# Altium PCB 1.PcbDoc (part 2 of 2)
Units mm, origin at the board's own origin, x right, y up, seen from the top; angles counter-clockwise.
Board outline 30 x 50 mm, 4 copper layers (Top Layer, Middle1, Middle2, Bottom Layer), stack 0.778 mm thick; 91 components, 108 nets, 401 pads, 138 vias.
Unrouted connection lines stored in the file: 70.
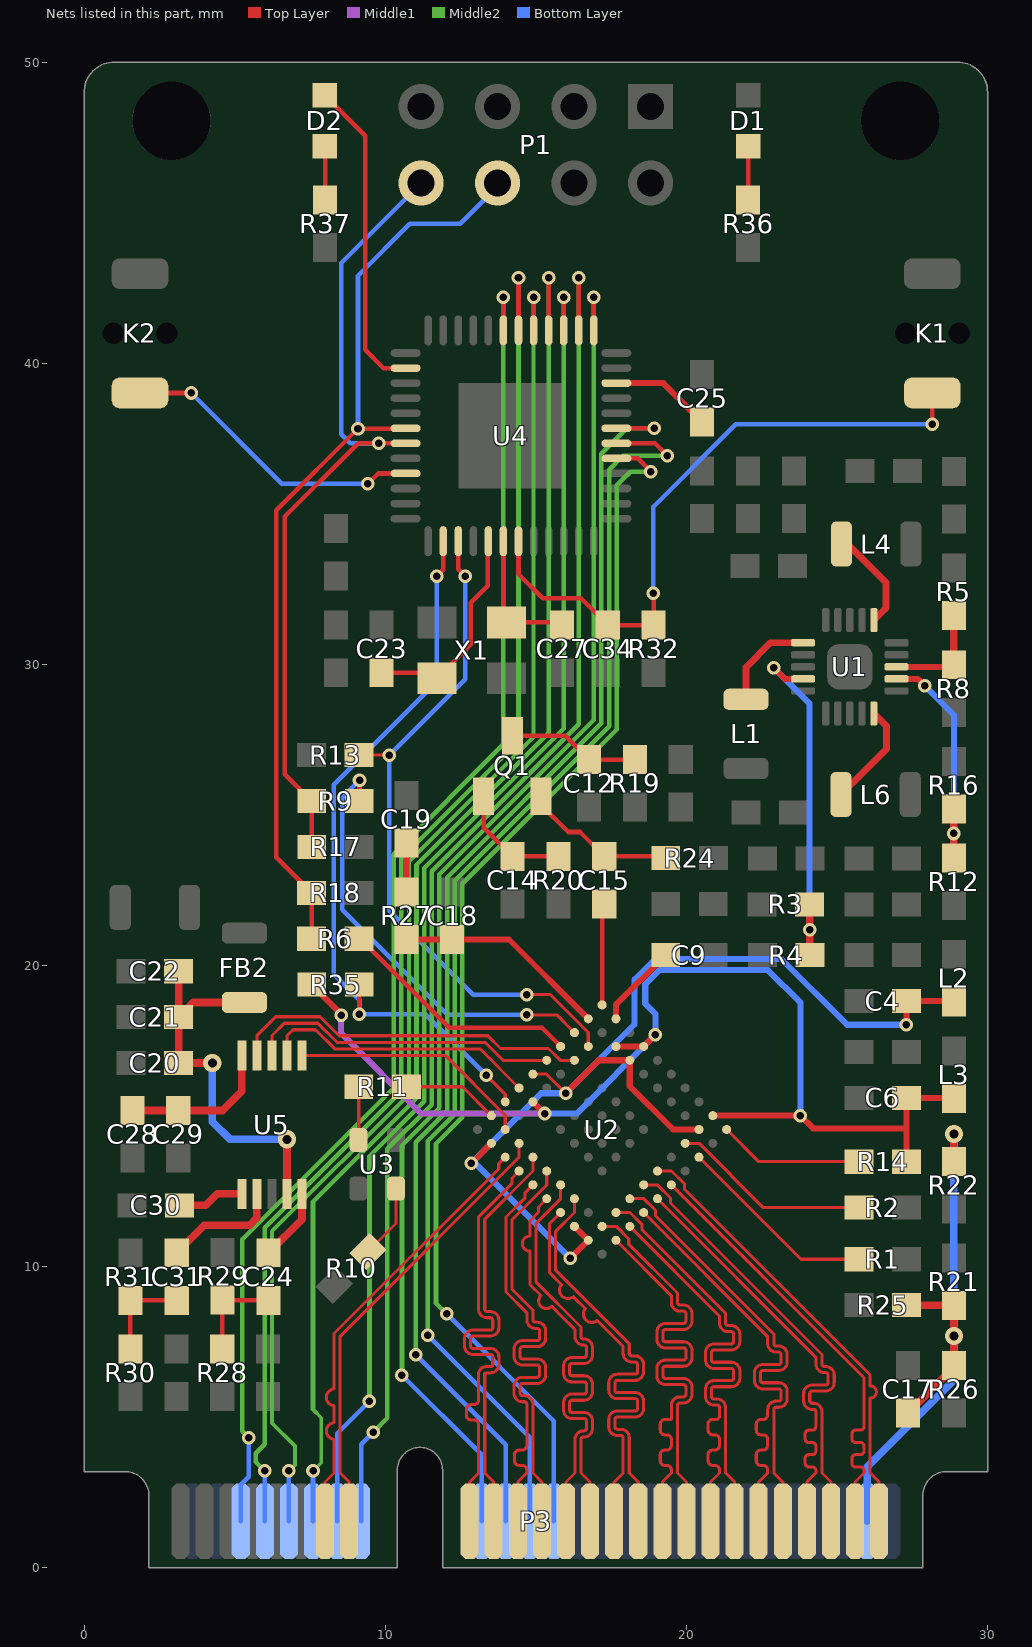
[diagram p4: the nets of this part, all layers, seen from the top]

## Via types
v1: diameter 0.45, hole 0.25, Top Layer to Bottom Layer, tented both sides, 84 vias
v2: diameter 0.6, hole 0.3, Top Layer to Bottom Layer, tented both sides, 54 vias

## Nets (pads, with @x,y where several pads share a name; then routed paths per layer and width w, separated by ;. In a path a pad name is that pad's centre, name@x,y a point inside that pad or via, vN(x,y) a via of type N, cw(c..) or ccw(c..) an arc to the next point about the centre after c; other vN are vias at no path point) (continued)
I2S_OSCK: U2.J4 U5.4 | length 12.1
  Top Layer w0.102: U5.4@5.736,17.019 5.736,17.674 6.363,18.301 7.831,18.301 8.461,17.67 13.404,17.67 13.827,17.247 15.419,17.247 15.811,16.855 U2.J4@16.281,16.855
I2S_SCK: U2.K7 U5.2 | length 9.2
  Top Layer w0.102: U5.2@6.736,17.019 6.736,17.67 6.934,17.869 7.683,17.869 8.319,17.234 13.144,17.234 U2.K7@14.442,15.935
I2S_SD: U2.J9 U5.1 | length 8
  Top Layer w0.102: U5.1@7.236,17.019 11.988,17.019 13.983,15.024 U2.J9@13.983,14.557
I2S_WFS: U2.K5 U5.3 | length 10.5
  Top Layer w0.102: U5.3@6.236,17.019 6.236,17.678 6.642,18.085 7.76,18.085 8.395,17.45 13.311,17.45 13.906,16.855 U2.K5@15.362,16.855
IIC_SCL: P1.6 R6.1 R18.1 U4.42 | length 31.2
  Top Layer w0.152: R6.1@7.551,20.892 R18.1@7.551,22.415 6.375,23.591 6.375,35.115 v1(9.093,37.833) 10.664,37.833 U4.42@10.673,37.842
  Bottom Layer w0.152: v1(9.093,37.833) 9.093,42.913 10.808,44.628 12.484,44.628 13.73,45.874 P1.6@13.73,45.987
IIC_SDA: P1.8 R9.1 R17.1 U4.43 | length 27.2
  Top Layer w0.152: R17.1@7.556,23.939 R9.1@7.557,25.463 6.667,26.353 6.667,34.912 9.097,37.342 v1(9.779,37.342) U4.43@10.673,37.342
  Bottom Layer w0.152: v1(9.779,37.342) 8.835,37.342 8.534,37.643 8.534,43.331 P1.8@11.19,45.987
INT: R13.1 U2.J3 U4.3 | length 23.2
  Top Layer w0.102: R13.1@9.131,26.987 v1(10.135,26.987) ; v1(14.694,19.037) 15.481,19.037 16.74,17.778 U2.J3@16.74,17.314
  Top Layer w0.152: U4.3@12.423,34.092 12.423,33.157 v1(12.649,32.931)
  Bottom Layer w0.152: v1(12.649,32.931) 12.649,29.502 v1(10.135,26.987) 10.135,21.819 12.916,19.037 v1(14.694,19.037)
KEY1: K2.1 U4.45 | length 10.2
  Top Layer w0.152: K2.1@1.854,39.014 v1(3.556,39.014) ; v1(9.423,36.005) 9.761,36.342 U4.45@10.673,36.342
  Bottom Layer w0.152: v1(3.556,39.014) 6.566,36.005 v1(9.423,36.005)
MIPI0_C_N: P3.23 U2.F9 | length 15.1
  Top Layer w0.102: P3.23@15.2,1.55 15.2,2.851 14.902,3.149 14.902,5.435 ccw(c14.617,5.435) 14.617,5.719 14.559,5.719 cw(c14.559,5.801) 14.477,5.801 14.477,6.044 cw(c14.559,6.044) 14.559,6.126 15.041,6.126 ccw(c15.041,6.41) 15.326,6.41 15.326,6.654 ccw(c15.041,6.654) 15.041,6.938 14.559,6.938 cw(c14.559,7.02) 14.477,7.02 14.477,7.264 cw(c14.559,7.264) 14.559,7.345 15.041,7.345 ccw(c15.041,7.629) 15.326,7.629 15.326,7.873 ccw(c15.041,7.873) 15.041,8.158 14.983,8.158 cw(c14.983,8.239) 14.902,8.239 14.902,8.555 14.211,9.246 14.211,11.567 15.362,12.717 U2.F9@15.362,13.178
MIPI0_C_P: P3.21 U2.F10 | length 15.1
  Top Layer w0.102: P3.21@14.4,1.55 14.4,2.851 14.698,3.149 14.698,3.251 ccw(c14.546,3.251) 14.546,3.403 14.444,3.403 cw(c14.444,3.556) 14.292,3.556 14.292,3.759 cw(c14.444,3.759) 14.444,3.911 14.546,3.911 ccw(c14.546,4.064) 14.698,4.064 14.698,4.381 14.698,5.435 ccw(c14.617,5.435) 14.617,5.516 14.559,5.516 cw(c14.559,5.801) 14.274,5.801 14.274,6.044 cw(c14.559,6.044) 14.559,6.329 15.041,6.329 ccw(c15.041,6.41) 15.123,6.41 15.123,6.654 ccw(c15.041,6.654) 15.041,6.735 14.559,6.735 cw(c14.559,7.02) 14.274,7.02 14.274,7.264 cw(c14.559,7.264) 14.559,7.548 15.041,7.548 ccw(c15.041,7.629) 15.123,7.629 15.123,7.873 ccw(c15.041,7.873) 15.041,7.954 14.983,7.954 cw(c14.983,8.239) 14.698,8.239 14.698,8.471 14.008,9.161 14.008,11.651 14.643,12.286 14.643,12.459 U2.F10@14.902,12.718
MIPI0_D0_N: P3.15 U2.H9 | length 15.1
  Top Layer w0.102: P3.15@8.8,1.55 8.8,2.851 8.502,3.149 8.502,7.695 14.442,13.636 U2.H9@14.442,14.097
MIPI0_D0_P: P3.13 U2.H10 | length 15.1
  Top Layer w0.102: P3.13@8,1.55 8,2.851 8.298,3.149 8.298,3.708 8.298,4.267 cw(c8.325,4.546) 8.298,4.826 8.298,5.384 cw(c8.325,5.664) 8.298,5.943 8.298,6.502 8.298,6.858 8.298,7.78 13.767,13.248 13.767,13.422 U2.H10@13.983,13.637
MIPI0_D1_N: P3.19 U2.G9 | length 15.1
  Top Layer w0.102: P3.19@13.6,1.55 13.6,2.851 13.302,3.149 13.302,6.439 cw(c13.34,6.439) 13.34,6.477 13.487,6.477 ccw(c13.487,6.761) 13.771,6.761 13.771,7.005 ccw(c13.487,7.005) 13.487,7.29 12.913,7.29 cw(c12.913,7.371) 12.832,7.371 12.832,7.615 cw(c12.913,7.615) 12.913,7.696 13.487,7.696 ccw(c13.487,7.981) 13.771,7.981 13.771,8.225 ccw(c13.487,8.225) 13.487,8.509 13.383,8.509 cw(c13.383,8.59) 13.302,8.59 13.302,11.576 14.902,13.177 U2.G9@14.902,13.637
MIPI0_D1_P: P3.17 U2.G10 | length 15.1
  Top Layer w0.102: P3.17@12.8,1.55 12.8,2.851 13.098,3.149 13.098,4.559 13.098,4.763 ccw(c12.946,4.763) 12.946,4.915 12.844,4.915 cw(c12.844,5.067) 12.692,5.067 12.692,5.271 cw(c12.844,5.271) 12.844,5.423 12.946,5.423 ccw(c12.946,5.575) 13.098,5.575 13.098,5.931 13.098,6.185 13.098,6.439 cw(c13.34,6.439) 13.34,6.68 13.487,6.68 ccw(c13.487,6.761) 13.568,6.761 13.568,7.005 ccw(c13.487,7.005) 13.487,7.087 12.913,7.087 cw(c12.913,7.371) 12.628,7.371 12.628,7.615 cw(c12.913,7.615) 12.913,7.899 13.487,7.899 ccw(c13.487,7.981) 13.568,7.981 13.568,8.225 ccw(c13.487,8.225) 13.487,8.306 13.383,8.306 cw(c13.383,8.59) 13.098,8.59 13.098,11.66 14.211,12.773 14.211,12.947 U2.G10@14.442,13.178
MIPI0_D2_N: P3.27 U2.E9 | length 15.1
  Top Layer w0.102: U2.E9@15.821,12.718 15.821,12.257 15.011,11.448 15.011,9.487 16.502,7.997 16.502,7.68 ccw(c16.583,7.68) 16.583,7.599 ; 16.583,4.348 ccw(c16.583,4.267) 16.502,4.267 16.502,3.149 16.8,2.851 P3.27@16.8,1.55 ; 16.598,4.348 ccw(c16.598,4.632) 16.883,4.632 16.883,4.876 ccw(c16.598,4.876) 16.598,5.161 16.202,5.161 cw(c16.202,5.242) 16.121,5.242 16.121,5.486 cw(c16.202,5.486) 16.202,5.567 16.598,5.567 ccw(c16.598,5.852) 16.883,5.852 16.883,6.095 ccw(c16.598,6.095) 16.598,6.38 16.202,6.38 cw(c16.202,6.461) 16.121,6.461 16.121,6.705 cw(c16.202,6.705) 16.202,6.786 16.598,6.786 ccw(c16.598,7.071) 16.883,7.071 16.883,7.315 ccw(c16.598,7.315) 16.598,7.599
MIPI0_D2_P: P3.25 U2.E10 | length 15.1
  Top Layer w0.102: U2.E10@15.362,12.259 15.088,11.985 15.088,11.811 14.808,11.532 14.808,11.024 ccw(c14.808,10.77) 14.808,10.516 14.808,10.008 14.808,9.5 14.808,9.403 15.167,9.044 ccw(c15.347,8.864) 15.527,8.684 15.886,8.325 16.239,7.972 16.298,7.913 16.298,7.68 ccw(c16.583,7.68) 16.583,7.396 ; P3.25@16,1.55 16,2.851 16.298,3.149 16.298,4.267 cw(c16.583,4.267) 16.583,4.551 ; 16.598,4.551 ccw(c16.598,4.632) 16.679,4.632 16.679,4.876 ccw(c16.598,4.876) 16.598,4.957 16.202,4.957 cw(c16.202,5.242) 15.917,5.242 15.917,5.486 cw(c16.202,5.486) 16.202,5.77 16.598,5.77 ccw(c16.598,5.852) 16.679,5.852 16.679,6.095 ccw(c16.598,6.095) 16.598,6.177 16.202,6.177 cw(c16.202,6.461) 15.917,6.461 15.917,6.705 cw(c16.202,6.705) 16.202,6.989 16.598,6.989 ccw(c16.598,7.071) 16.679,7.071 16.679,7.315 ccw(c16.598,7.315) 16.598,7.396
MIPI0_D3_N: P3.31 U2.D9 | length 15.1
  Top Layer w0.102: U2.D9@16.281,12.259 16.281,11.798 15.659,11.176 15.659,9.881 18.102,7.438 18.102,7.122 ccw(c18.183,7.122) 18.183,7.04 18.295,7.04 cw(c18.295,6.756) 18.579,6.756 18.579,6.512 cw(c18.295,6.512) 18.295,6.228 17.705,6.228 ccw(c17.705,6.146) 17.624,6.146 17.624,5.903 ccw(c17.705,5.903) 17.705,5.821 18.295,5.821 cw(c18.295,5.537) 18.579,5.537 18.579,5.293 cw(c18.295,5.293) 18.295,5.008 17.705,5.008 ccw(c17.705,4.927) 17.624,4.927 17.624,4.683 ccw(c17.705,4.683) 17.705,4.602 17.817,4.602 cw(c17.817,4.318) 18.102,4.318 18.102,3.149 18.4,2.851 P3.31@18.4,1.55
MIPI0_D3_P: P3.29 U2.D10 | length 15.1
  Top Layer w0.102: U2.D10@15.821,11.799 15.456,11.434 15.456,9.796 15.851,9.401 ccw(c16.067,9.223) 16.246,9.006 16.641,8.611 ccw(c16.858,8.432) 17.036,8.216 17.432,7.821 17.617,7.635 17.898,7.354 17.898,7.122 ccw(c18.183,7.122) 18.183,6.837 18.295,6.837 cw(c18.295,6.756) 18.376,6.756 18.376,6.512 cw(c18.295,6.512) 18.295,6.431 17.705,6.431 ccw(c17.705,6.146) 17.421,6.146 17.421,5.903 ccw(c17.705,5.903) 17.705,5.618 18.295,5.618 cw(c18.295,5.537) 18.376,5.537 18.376,5.293 cw(c18.295,5.293) 18.295,5.212 17.705,5.212 ccw(c17.705,4.927) 17.421,4.927 17.421,4.683 ccw(c17.705,4.683) 17.705,4.399 17.817,4.399 cw(c17.817,4.318) 17.898,4.318 17.898,3.149 17.6,2.851 P3.29@17.6,1.55
MIPI1_C_N: P3.43 U2.B7 | length 15.1
  Top Layer w0.102: U2.B7@18.119,12.259 18.587,12.259 18.974,11.871 18.974,11.691 22.902,7.764 22.902,7.447 ccw(c22.983,7.447) 22.983,7.366 23.062,7.366 cw(c23.062,7.081) 23.346,7.081 23.346,6.838 cw(c23.062,6.838) 23.062,6.553 22.538,6.553 ccw(c22.538,6.472) 22.457,6.472 22.457,6.228 ccw(c22.538,6.228) 22.538,6.147 23.062,6.147 cw(c23.062,5.862) 23.346,5.862 23.346,5.618 cw(c23.062,5.618) 23.062,5.334 22.983,5.334 ccw(c22.983,5.253) 22.902,5.253 22.902,3.149 23.2,2.851 P3.43@23.2,1.55
MIPI1_C_P: P3.41 U2.A7 | length 15.1
  Top Layer w0.102: U2.A7@18.579,11.799 22.698,7.679 22.698,7.447 ccw(c22.983,7.447) 22.983,7.163 23.062,7.163 cw(c23.062,7.081) 23.143,7.081 23.143,6.838 cw(c23.062,6.838) 23.062,6.756 22.538,6.756 ccw(c22.538,6.472) 22.254,6.472 22.254,6.228 ccw(c22.538,6.228) 22.538,5.943 23.062,5.943 cw(c23.062,5.862) 23.143,5.862 23.143,5.618 cw(c23.062,5.618) 23.062,5.537 22.983,5.537 ccw(c22.983,5.253) 22.698,5.253 22.698,5.08 cw(c22.546,5.08) 22.546,4.927 22.47,4.927 ccw(c22.47,4.775) 22.317,4.775 22.317,4.572 ccw(c22.47,4.572) 22.47,4.419 22.546,4.419 cw(c22.546,4.267) 22.698,4.267 22.698,4.064 cw(c22.546,4.064) 22.546,3.911 22.47,3.911 ccw(c22.47,3.759) 22.317,3.759 22.317,3.556 ccw(c22.47,3.556) 22.47,3.403 22.546,3.403 cw(c22.546,3.251) 22.698,3.251 22.698,3.149 22.4,2.851 P3.41@22.4,1.55
MIPI1_D0_N: P3.35 U2.B9 | length 15.1
  Top Layer w0.102: U2.B9@17.2,11.339 17.668,11.339 18.085,10.922 18.085,10.742 19.702,9.125 19.702,8.809 ccw(c19.783,8.809) 19.783,8.727 19.9,8.727 cw(c19.9,8.443) 20.184,8.443 20.184,8.199 cw(c19.9,8.199) 19.9,7.915 19.3,7.915 ccw(c19.3,7.833) 19.219,7.833 19.219,7.589 ccw(c19.3,7.589) 19.3,7.508 19.9,7.508 cw(c19.9,7.224) 20.184,7.224 20.184,6.98 cw(c19.9,6.98) 19.9,6.695 19.3,6.695 ccw(c19.3,6.614) 19.219,6.614 19.219,6.37 ccw(c19.3,6.37) 19.3,6.289 19.9,6.289 cw(c19.9,6.004) 20.184,6.004 20.184,5.761 cw(c19.9,5.761) 19.9,5.476 19.783,5.476 ccw(c19.783,5.395) 19.702,5.395 19.702,3.149 20,2.851 P3.35@20,1.55
MIPI1_D0_P: P3.33 U2.A9 | length 15.1
  Top Layer w0.102: U2.A9@17.66,10.88 19.498,9.041 19.498,8.809 ccw(c19.783,8.809) 19.783,8.524 19.9,8.524 cw(c19.9,8.443) 19.981,8.443 19.981,8.199 cw(c19.9,8.199) 19.9,8.118 19.3,8.118 ccw(c19.3,7.833) 19.016,7.833 19.016,7.589 ccw(c19.3,7.589) 19.3,7.305 19.9,7.305 cw(c19.9,7.224) 19.981,7.224 19.981,6.98 cw(c19.9,6.98) 19.9,6.899 19.3,6.899 ccw(c19.3,6.614) 19.016,6.614 19.016,6.37 ccw(c19.3,6.37) 19.3,6.086 19.9,6.086 cw(c19.9,6.004) 19.981,6.004 19.981,5.761 cw(c19.9,5.761) 19.9,5.679 19.783,5.679 ccw(c19.783,5.395) 19.498,5.395 19.498,4.953 cw(c19.473,4.953) 19.473,4.927 19.282,4.927 ccw(c19.282,4.775) 19.13,4.775 19.13,4.572 ccw(c19.282,4.572) 19.282,4.419 19.346,4.419 cw(c19.346,4.267) 19.498,4.267 19.498,4.064 cw(c19.346,4.064) 19.346,3.911 19.282,3.911 ccw(c19.282,3.759) 19.13,3.759 19.13,3.556 ccw(c19.282,3.556) 19.282,3.403 19.346,3.403 cw(c19.346,3.251) 19.498,3.251 19.498,3.149 19.2,2.851 P3.33@19.2,1.55
MIPI1_D1_N: P3.39 U2.B8 | length 15.1
  Top Layer w0.102: U2.B8@17.66,11.799 18.127,11.799 18.529,11.397 18.529,11.217 21.302,8.444 21.302,8.128 ccw(c21.383,8.128) 21.383,8.047 21.487,8.047 cw(c21.487,7.762) 21.771,7.762 21.771,7.518 cw(c21.487,7.518) 21.487,7.234 20.913,7.234 ccw(c20.913,7.153) 20.832,7.153 20.832,6.909 ccw(c20.913,6.909) 20.913,6.827 21.487,6.827 cw(c21.487,6.543) 21.771,6.543 21.771,6.299 cw(c21.487,6.299) 21.487,6.015 20.913,6.015 ccw(c20.913,5.933) 20.832,5.933 20.832,5.689 ccw(c20.913,5.689) 20.913,5.608 21.017,5.608 cw(c21.017,5.324) 21.302,5.324 21.302,3.149 21.6,2.851 P3.39@21.6,1.55
MIPI1_D1_P: P3.37 U2.A8 | length 15.1
  Top Layer w0.102: U2.A8@18.119,11.339 21.098,8.36 21.098,8.128 ccw(c21.383,8.128) 21.383,7.843 21.487,7.843 cw(c21.487,7.762) 21.568,7.762 21.568,7.518 cw(c21.487,7.518) 21.487,7.437 20.913,7.437 ccw(c20.913,7.153) 20.628,7.153 20.628,6.909 ccw(c20.913,6.909) 20.913,6.624 21.487,6.624 cw(c21.487,6.543) 21.568,6.543 21.568,6.299 cw(c21.487,6.299) 21.487,6.218 20.913,6.218 ccw(c20.913,5.933) 20.628,5.933 20.628,5.689 ccw(c20.913,5.689) 20.913,5.405 21.017,5.405 cw(c21.017,5.324) 21.098,5.324 21.098,5.042 cw(c20.984,5.042) 20.984,4.927 20.87,4.927 ccw(c20.87,4.775) 20.717,4.775 20.717,4.572 ccw(c20.87,4.572) 20.87,4.419 20.946,4.419 cw(c20.946,4.267) 21.098,4.267 21.098,4.064 cw(c20.946,4.064) 20.946,3.911 20.87,3.911 ccw(c20.87,3.759) 20.717,3.759 20.717,3.556 ccw(c20.87,3.556) 20.87,3.403 20.946,3.403 cw(c20.946,3.251) 21.098,3.251 21.098,3.149 20.8,2.851 P3.37@20.8,1.55
MIPI1_D2_N: P3.47 U2.B6 | length 15.2
  Top Layer w0.102: U2.B6@18.579,12.718 19.032,12.718 19.469,12.281 19.469,12.115 24.502,7.083 24.502,6.766 ccw(c24.583,6.766) 24.583,6.685 24.624,6.685 cw(c24.624,6.401) 24.908,6.401 24.908,6.157 cw(c24.624,6.157) 24.624,5.872 24.176,5.872 ccw(c24.176,5.791) 24.095,5.791 24.095,5.547 ccw(c24.176,5.547) 24.176,5.466 24.217,5.466 cw(c24.217,5.181) 24.502,5.181 24.502,3.149 24.8,2.851 P3.47@24.8,1.55
MIPI1_D2_P: P3.45 U2.A6 | length 15.2
  Top Layer w0.102: U2.A6@19.038,12.259 24.298,6.999 24.298,6.766 ccw(c24.583,6.766) 24.583,6.482 24.624,6.482 cw(c24.624,6.401) 24.705,6.401 24.705,6.157 cw(c24.624,6.157) 24.624,6.075 24.176,6.075 ccw(c24.176,5.791) 23.892,5.791 23.892,5.547 ccw(c24.176,5.547) 24.176,5.263 24.217,5.263 cw(c24.217,5.181) 24.298,5.181 24.298,4.978 24.298,4.694 cw(c24.176,4.694) 24.176,4.572 24.065,4.572 ccw(c24.065,4.45) 23.943,4.45 23.943,4.287 ccw(c24.065,4.287) 24.065,4.165 24.176,4.165 cw(c24.176,4.043) 24.298,4.043 24.298,3.881 cw(c24.176,3.881) 24.176,3.759 24.065,3.759 ccw(c24.065,3.637) 23.943,3.637 23.943,3.474 ccw(c24.065,3.474) 24.065,3.352 24.176,3.352 cw(c24.176,3.23) 24.298,3.23 24.298,3.149 24,2.851 P3.45@24,1.55
MIPI1_D3_N: P3.51 U2.B5 | length 15.2
  Top Layer w0.102: U2.B5@19.038,13.178 19.506,13.178 19.939,12.745 19.939,12.565 26.102,6.402 26.102,6.045 cw(c26.102,5.842) 26.102,5.639 26.102,5.232 26.102,5.143 26.102,3.149 26.4,2.851 P3.51@26.4,1.55
MIPI1_D3_P: P3.49 U2.A5 | length 15.1
  Top Layer w0.102: U2.A5@19.498,12.718 25.898,6.318 25.898,5.118 25.898,4.978 25.898,4.694 cw(c25.776,4.694) 25.776,4.572 25.614,4.572 ccw(c25.614,4.45) 25.492,4.45 25.492,4.287 ccw(c25.614,4.287) 25.614,4.165 25.776,4.165 cw(c25.776,4.043) 25.898,4.043 25.898,3.881 cw(c25.776,3.881) 25.776,3.759 25.614,3.759 ccw(c25.614,3.637) 25.492,3.637 25.492,3.474 ccw(c25.614,3.474) 25.614,3.352 25.776,3.352 cw(c25.776,3.23) 25.898,3.23 25.898,3.149 25.6,2.851 P3.49@25.6,1.55
NetC4_1: C4.1 L2.2 U2.B2 U2.B10 U2.C10 U2.G2 U2.J10 U2.K6 | length 36.2
  Top Layer w0.102: v1(12.852,13.437) v1@12.863,13.437 ; U2.K6@14.902,16.395 15.355,16.395 v1(15.989,15.761)
  Top Layer w0.203: v1@12.863,13.437 U2.J10@13.523,14.097 ; v1(15.989,15.761) 17.083,16.855 U2.G2@18.119,16.855 18.119,15.993 19.556,14.557 U2.B2@20.417,14.557 ; v1(16.142,10.274) 16.142,10.281 U2.B10@16.74,10.88 U2.C10@16.281,11.339 ; v1@27.318,18.021 v1(27.305,18.034) C4.1@27.305,18.821 28.854,18.821 L2.2@28.88,18.796
  Bottom Layer w0.203: v1(16.142,10.274) 12.979,13.437 v1(12.852,13.437) 15.176,15.761 v1(15.989,15.761) 18.275,18.047 18.275,19.533 18.961,20.218 23.152,20.218 25.336,18.034 v1(27.305,18.034)
NetC9_2: C9.2 U2.J1 | length 2.8
  Top Layer w0.203: U2.J1@17.66,18.234 17.66,18.694 C9.2@19.312,20.345
NetC12_2: C12.2 Q1.3 R19.1 | length 4.4
  Top Layer w0.152: Q1.3@14.217,27.628 15.976,27.628 C12.2@16.764,26.84 R19.1@18.288,26.84
NetC14_2: C14.2 Q1.1 R20.2 | length 3.9
  Top Layer w0.152: Q1.1@13.267,25.629 13.267,24.579 C14.2@14.224,23.622 14.229,23.627 R20.2@15.748,23.627
NetC15_1: C15.1 Q1.2 R24.2 | length 5.2
  Top Layer w0.152: Q1.2@15.167,25.629 15.167,25.346 16.078,24.435 16.464,24.435 C15.1@17.272,23.627 19.258,23.627 R24.2@19.314,23.571
NetC19_2: C19.2 R27.2 | length 1.6
  Top Layer w0.203: R27.2@10.699,22.446 C19.2@10.699,24.066
NetC20_1: C20.1 C21.1 C22.1 FB2.1 U5.9 | length 13.1
  Top Layer w0.254: C22.1@3.137,19.812 C21.1@3.137,18.288 ; v2@4.267,16.751 v2(4.255,16.764) C20.1@3.137,16.764 C21.1@3.137,18.288 ; FB2.1@5.321,18.776 3.625,18.776 C21.1@3.137,18.288 ; U5.9@6.736,12.419 v2(6.736,14.232)
  Bottom Layer w0.254: v2(4.255,16.764) 4.255,14.821 4.843,14.232 v2(6.736,14.232)
NetC23_1: C23.1 U4.5 X1.1 | length 7.2
  Top Layer w0.152: C23.1@9.881,29.726 11.54,29.726 X1.1@11.721,29.544 12.84,30.663 12.84,32.05 13.404,32.614 13.404,34.072 U4.5@13.423,34.092
NetC24_1: C24.1 U5.10 | length 2.4
  Top Layer w0.254: C24.1@6.121,10.465 7.236,11.579 U5.10@7.236,12.419
NetC24_2: C24.2 R28.2 R29.2 | length 3.2
  Top Layer w0.152: R28.2@4.585,7.264 4.585,8.877 R29.2@4.597,8.89 6.116,8.89 C24.2@6.121,8.885
NetC25_2: C25.2 U4.22 | length 3.4
  Top Layer w0.203: U4.22@17.673,39.342 19.23,39.342 C25.2@20.523,38.049
NetC27_1: C27.1 U4.6 X1.3 | length 4.6
  Top Layer w0.152: U4.6@13.923,34.092 13.923,31.492 X1.3@14.021,31.394 15.773,31.394 C27.1@15.862,31.305
NetC28_1: C28.1 C29.1 U5.5 | length 5.1
  Top Layer w0.254: C28.1@1.6,15.189 C29.1@3.124,15.189 4.597,15.189 5.236,15.828 U5.5@5.236,17.019
NetC30_1: C30.1 U5.6 | length 2.2
  Top Layer w0.254: C30.1@3.162,12.04 4.039,12.04 4.418,12.419 U5.6@5.236,12.419
NetC31_1: C31.1 U5.7 | length 3.9
  Top Layer w0.254: C31.1@3.073,10.465 3.988,11.379 5.494,11.379 5.736,11.62 U5.7@5.736,12.419
NetC31_2: C31.2 R30.2 R31.2 | length 3.2
  Top Layer w0.152: R30.2@1.537,7.264 R31.2@1.537,8.885 C31.2@3.073,8.885
NetD1_1: D1.1 R36.2 | length 1.8
  Top Layer w0.152: R36.2@22.047,45.428 D1.1@22.047,47.2
NetD2_1: D2.1 R37.2 | length 1.8
  Top Layer w0.152: D2.1@7.988,47.2 8,47.188 R37.2@8,45.428
NetL1_2: L1.2 U1.11 | length 3.3
  Top Layer w0.229: L1.2@21.979,28.843 21.979,29.903 22.796,30.721 U1.11@23.875,30.721
NetL4_2: L4.2 U1.6 | length 3.4
  Top Layer w0.229: L4.2@25.152,33.998 25.349,33.998 26.632,32.715 26.632,31.878 U1.6@26.225,31.471
NetL6_2: L6.2 U1.20 | length 3.5
  Top Layer w0.229: L6.2@25.132,25.679 26.645,27.192 26.645,27.952 U1.20@26.225,28.371
NetR1_2: R1.2 U2.A3 | length 6.7
  Top Layer w0.102: U2.A3@20.417,13.637 23.806,10.249 R1.2@25.725,10.249
NetR2_2: R2.2 U2.B3 | length 6.7
  Top Layer w0.102: U2.B3@19.958,14.097 20.422,14.097 22.555,11.963 R2.2@25.725,11.963
NetR3_1: R3.1 R4.2 U1.14 | length 12
  Top Layer w0.203: v1(22.902,29.883) 23.263,29.521 U1.14@23.875,29.521
  Top Layer w0.254: R3.1@24.092,22.034 v1(24.092,21.196) 24.092,20.358 R4.2@24.105,20.345
  Bottom Layer w0.203: v1(22.902,29.883) 24.092,28.693 v1(24.092,21.196)
NetR5_1: R5.1 R8.2 U1.3 | length 3.5
  Top Layer w0.203: U1.3@26.975,29.921 R8.2@28.669,29.921
  Top Layer w0.254: R8.2@28.669,29.921 28.88,30.132 R5.1@28.88,31.623
NetR6_2: R6.2 U2.K4 | length 8.2
  Top Layer w0.152: R6.2@9.131,20.892 9.169,20.892 12.128,17.932 15.203,17.932 U2.K4@15.821,17.314
NetR9_2: R9.2 U2.K3 | length 14.6
  Top Layer w0.102: v1(14.694,18.364) 15.691,18.364 U2.K3@16.281,17.774
  Top Layer w0.152: R9.2@9.136,25.463 9.144,25.471 v1(9.144,26.149)
  Bottom Layer w0.152: v1(9.144,26.149) 8.572,25.578 8.572,21.857 12.065,18.364 v1(14.694,18.364)
NetR10_1: R10.1 U3.1 | length 2.5
  Top Layer w0.102: R10.1@9.423,10.503 10.356,11.435 U3.1@10.356,12.591
NetR11_1: R11.1 U3.3 | length 1.8
  Top Layer w0.102: U3.3@9.106,14.211 9.119,14.224 R11.1@9.119,15.977
NetR12_1: R12.1 R16.2 U1.2 | length 8
  Top Layer w0.203: U1.2@26.975,29.521 27.68,29.521 v1(27.915,29.286)
  Top Layer w0.254: R12.1@28.88,23.576 v1(28.88,24.387) R16.2@28.88,25.197
  Bottom Layer w0.203: v1(27.915,29.286) 28.88,28.321 v1(28.88,24.387)
NetR14_1: R14.1 U2.A1 | length 4.8
  Top Layer w0.102: U2.A1@21.337,14.557 22.406,13.487 R14.1@25.725,13.487
PA7: P3.24 U4.17 | length 41.2
  Top Layer w0.152: U4.17@17.673,36.842 18.378,36.842 v1(18.821,36.398)
  Middle2 w0.152: v1(12.035,8.441) 11.684,8.792 11.684,14.088 12.56,14.964 12.56,22.715 17.685,27.84 17.685,35.948 18.136,36.398 v1(18.821,36.398)
  Bottom Layer w0.152: v1(12.035,8.441) 15.6,4.877 P3.24@15.6,1.55
PA8: P3.10 U4.29 | length 45.7
  Top Layer w0.152: U4.29@14.923,41.092 v1(14.923,42.189)
  Middle2 w0.127: v1(6.8,3.219) 6.998,3.417 6.998,4.044 6.238,4.803 6.238,11.181 10.782,15.724 10.782,23.451 14.923,27.592 v1(14.923,42.189)
  Bottom Layer w0.152: P3.10@6.8,1.55 v1(6.8,3.219)
PA9: P3.8 U4.30 | length 46.8
  Top Layer w0.152: U4.30@14.423,41.092 v1(14.423,42.837)
  Middle2 w0.152: v1(6,3.219) 5.702,3.517 5.702,3.81 5.997,4.105 5.997,11.299 10.528,15.83 10.528,23.557 14.423,27.452 v1(14.423,42.837)
  Bottom Layer w0.152: P3.8@6,1.55 v1(6,3.219)
PA10: P3.6 U4.31 | length 45.5
  Top Layer w0.152: U4.31@13.923,41.092 v1(13.923,42.189)
  Middle2 w0.152: v1(5.461,4.318) 5.245,4.534 5.245,10.906 10.274,15.935 10.274,23.698 13.923,27.347 v1(13.923,42.189)
  Bottom Layer w0.152: P3.6@5.2,1.55 5.2,2.762 5.461,3.023 v1(5.461,4.318)
PB0: P3.22 U4.18 | length 42.8
  Top Layer w0.152: U4.18@17.673,37.342 18.957,37.342 v1(19.367,36.932)
  Middle2 w0.152: v1(11.411,7.728) 11.411,14.174 12.306,15.07 12.306,22.82 17.431,27.945 17.431,36.469 17.894,36.932 v1(19.367,36.932)
  Bottom Layer w0.152: v1(11.411,7.728) 14.8,4.339 P3.22@14.8,1.55
PB1: P3.20 U4.19 | length 42.6
  Top Layer w0.152: U4.19@17.673,37.842 v1(18.932,37.842) v1@18.936,37.846
  Middle2 w0.152: v1(11.011,7.074) 11.008,7.077 11.008,14.131 12.052,15.175 12.052,22.925 17.177,28.05 17.177,37.002 18.017,37.842 v1(18.932,37.842)
  Bottom Layer w0.152: v1(11.011,7.074) 14,4.085 P3.20@14,1.55
PB12: P3.18 U4.25 | length 45.5
  Top Layer w0.152: U4.25@16.923,41.092 v1(16.923,42.189)
  Middle2 w0.152: v1(10.554,6.401) 10.554,14.035 11.798,15.28 11.798,23.031 16.923,28.155 v1(16.923,42.189)
  Bottom Layer w0.152: v1(10.554,6.401) 13.2,3.755 P3.18@13.2,1.55
PB13: P3.16 U4.26 | length 46
  Top Layer w0.152: U4.26@16.423,41.092 v1(16.423,42.837)
  Middle2 w0.152: v1(9.601,4.508) 10.071,4.978 10.071,13.912 11.544,15.385 11.544,23.136 16.423,28.015 v1(16.423,42.837)
  Bottom Layer w0.152: P3.16@9.2,1.55 9.2,4.107 v1(9.601,4.508)
PB14: P3.14 U4.27 | length 44.9
  Top Layer w0.152: U4.27@15.923,41.092 v1(15.923,42.189)
  Middle2 w0.152: v1(9.474,5.537) 9.474,13.674 11.29,15.49 11.29,23.241 15.923,27.874 v1(15.923,42.189)
  Bottom Layer w0.152: P3.14@8.4,1.55 8.4,4.463 v1(9.474,5.537)
PB15: P3.12 U4.28 | length 46.5
  Top Layer w0.152: U4.28@15.423,41.092 v1(15.423,42.837)
  Middle2 w0.127: v1(7.6,3.219) 7.874,3.493 7.874,4.988 7.6,5.262
  Middle2 w0.152: 7.6,5.262 7.6,12.159 11.036,15.596 11.036,23.346 15.423,27.733 v1(15.423,42.837)
  Bottom Layer w0.152: P3.12@7.6,1.55 v1(7.6,3.219)
PCKIN: C15.2 U2.K1 | length 3.4
  Top Layer w0.152: U2.K1@17.2,18.693 17.2,21.975 C15.2@17.272,22.047
PFIL: C18.2 R27.1 U2.K2 | length 7.1
  Top Layer w0.203: R27.1@10.699,20.866 C18.2@12.217,20.866 14.108,20.866 U2.K2@16.74,18.234
SRST: C34.2 K1.1 R32.1 U4.7 | length 21.7
  Top Layer w0.152: U4.7@14.423,34.092 14.423,32.999 15.227,32.194 16.497,32.194 C34.2@17.386,31.305 R32.1@18.91,31.305 18.91,32.347 v1(18.898,32.36) ; v1(28.169,37.973) K1.1@28.169,39.014
  Bottom Layer w0.152: v1(18.898,32.36) 18.898,35.23 21.641,37.973 v1(28.169,37.973)
T3V3: C6.1 L3.2 R14.2 R35.1 U2.B1 U2.G1 U2.H2 U2.J7 | length 38.3
  Top Layer w0.102: v1(8.534,18.351) v1@8.534,18.39
  Top Layer w0.203: R35.1@7.556,19.367 v1@8.534,18.39 ; U2.J7@14.902,15.476 v1(15.291,15.088) ; U2.H2@17.66,17.314 U2.G1@18.579,17.314 v1(18.967,17.703) ; U2.B1@20.877,15.016 v1(23.782,15.016) 24.206,14.592 27.305,14.592 ; R14.2@27.305,13.487 27.305,14.592 ; L3.2@28.88,15.583 28.854,15.608 C6.1@27.305,15.608 27.305,14.592
  Middle1 w0.203: v1(8.534,18.351) 8.534,17.755 11.201,15.088 v1(15.291,15.088)
  Bottom Layer w0.203: v1(15.291,15.088) 16.351,15.088 v1(18.967,17.703) 18.967,18.396 18.631,18.732 18.631,19.38 19.101,19.85 22.708,19.85 23.782,18.775 v1(23.782,15.016)
TCLK: R11.2 U2.K9 | length 3.2
  Top Layer w0.102: R11.2@10.699,15.977 12.563,15.977 U2.K9@13.523,15.016
TRST: R35.2 U2.K8 U4.2 | length 24.8
  Top Layer w0.102: v1(13.348,16.358) 13.983,15.723 U2.K8@13.983,15.476
  Top Layer w0.152: v1@9.131,18.377 v1(9.136,18.382) R35.2@9.136,19.367 ; v1(11.709,32.931) 11.923,33.145 U4.2@11.923,34.092
  Bottom Layer w0.152: v1(11.709,32.931) 11.709,29.426 8.293,26.01 8.293,19.71 9.136,18.867 v1(9.136,18.382) 11.323,18.382 v1(13.348,16.358)
USR_LED: D2.2 U4.38 | length 10.6
  Top Layer w0.152: D2.2@7.988,48.9 9.334,47.554 9.334,40.45 9.942,39.842 U4.38@10.673,39.842
VHDMI: C17.2 P3.50 R21.2 R22.2 R25.1 R26.2 | length 20.8
  Top Layer w0.254: R25.1@27.305,8.725 28.867,8.725 R21.2@28.88,8.712 v2(28.88,7.704) R26.2@28.88,6.718 28.88,6.662 C17.2@27.356,5.138 ; R22.2@28.88,13.493 v2(28.88,14.414)
  Bottom Layer w0.254: P3.50@26,1.55 26,3.356 28.88,6.236 v2(28.88,7.704) v2(28.88,14.414)
pads on no net: K1.0 K2.0 U2.J5 U2.J6 U2.J8 U4.4 U4.12 U4.13 U4.14 U4.15 U4.16 U4.21 U4.39 U4.40 U4.41 U4.46

## Polygon pours and split planes (outlines as drawn)
no net on Top Solder (solid): 24.2,45.15 29.6,45.15 29.6,49.6 24.2,49.6
no net on Top Solder (solid, pour order 5): 0.4,45.15 5.8,45.15 5.8,49.6 0.4,49.6
no net on Top Solder (solid): 0,2.845 29.997,2.845 29.997,-0.597 0,-0.597
no net on Bottom Solder (solid): 0.4,45.15 5.8,45.15 5.8,49.6 0.4,49.6
no net on Bottom Solder (solid): 24.2,45.15 29.6,45.15 29.6,49.6 24.2,49.6
no net on Bottom Solder (solid): 0,2.87 29.997,2.87 29.997,-0.597 0,-0.597
GND on Middle1 "GND_L02_P001" (solid, remove dead copper, pour order 1): 2.15,0 2.15,2.4 ccw(c1.35,2.4) 1.35,3.2 0,3.2 0,49.95 cw(c1,49.95) 1,50.95 29,50.95 cw(c29,49.95) 30,49.95 30,3.2 28.65,3.2 ccw(c28.65,2.4) 27.85,2.4 27.85,0 11.9,0 11.9,3.25 ccw(c11.15,3.25) 10.4,3.25 10.4,0
GND on Middle2 "GND_L03_P002" (solid, remove dead copper, pour order 2): 2.15,0 2.15,2.4 ccw(c1.35,2.4) 1.35,3.2 0,3.2 0,49.95 cw(c1,49.95) 1,50.95 29,50.95 cw(c29,49.95) 30,49.95 30,3.2 28.65,3.2 ccw(c28.65,2.4) 27.85,2.4 27.85,0 11.9,0 11.9,3.25 ccw(c11.15,3.25) 10.4,3.25 10.4,0
GND on Bottom Layer "GND_L04_P003" (solid, remove dead copper, pour order 3): 2.15,0 2.15,2.4 ccw(c1.35,2.4) 1.35,3.2 0,3.2 0,49.95 cw(c1,49.95) 1,50.95 29,50.95 cw(c29,49.95) 30,49.95 30,3.2 28.65,3.2 ccw(c28.65,2.4) 27.85,2.4 27.85,0 11.9,0 11.9,3.25 ccw(c11.15,3.25) 10.4,3.25 10.4,0
GND on Top Layer "GND_L01_P000" (solid, remove dead copper, pour order 0): 2.15,0 2.15,2.4 ccw(c1.35,2.4) 1.35,3.2 0,3.2 0,49.95 cw(c1,49.95) 1,50.95 29,50.95 cw(c29,49.95) 30,49.95 30,3.2 28.65,3.2 ccw(c28.65,2.4) 27.85,2.4 27.85,0 11.9,0 11.9,3.25 ccw(c11.15,3.25) 10.4,3.25 10.4,0

## Other copper
Top Layer:
  pour cut-out: 0,3.2 30,3.2 30,-0.582 29.985,-0.597 0,-0.597
Middle1:
  pour cut-out: 0,3.2 30,3.2 30,-0.582 29.985,-0.597 0,-0.597
Middle2:
  pour cut-out: 0,3.2 30,3.2 30,-0.582 29.985,-0.597 0,-0.597
Bottom Layer:
  pour cut-out: 0,3.2 30,3.2 30,-0.582 29.985,-0.597 0,-0.597

## Silkscreen, mask and mechanical layers (free items; w line width, h text height)
Top Overlay:
  text "AC" at 11.811,42.507 h1.02 r90
  text "LD" at 14.393,42.507 h1.02 r90
  text "BG" at 16.976,42.507 h1.02 r90
  text "35" at 19.558,42.507 h1.02 r90
  text "KEY" at 5.169,39.464 h1.02 r90
  text "LED" at 8.649,39.464 h1.02 r90
  text "PWR" at 22.771,39.464 h1.02 r90
  text "RST" at 26.289,39.464 h1.02 r90
Top Solder:
  drawing of 401 lines, arcs and shapes, not listed
  text "CORE V0.1" at 2.603,32.258 h1.02 r270
  text "TC358870" at 4.331,32.004 h1.02 r270
  text "BY YLJ" at 0.876,30.988 h1.02 r270
Mechanical 1:
  lines w0.254: 2.15,2.4 ccw(c1.35,2.4) 1.35,3.2 0,3.2 0,49 cw(c1,49) 1,50 29,50 cw(c29,49) 30,49 30,3.2 28.65,3.2 ccw(c28.65,2.4) 27.85,2.4 27.85,0 11.9,0 11.9,3.25 ccw(c11.15,3.25) 10.4,3.25 ; 2.15,2.4 2.15,2.4 ; 2.15,2.4 2.15,0 10.4,0 10.4,3.25 ; 10.4,3.25 10.4,3.25

## Text inside footprints (layer, text, board x,y; h text height)
P3: Top Overlay "1" at 2.769,0.203 h0.8 r90; Top Overlay "15" at 9.703,0.178 h0.8 r90; Top Overlay "17" at 12.446,0.127 h0.8 r90; Top Overlay "51" at 27.407,0.203 h0.8 r90; Bottom Overlay "2" at 2.921,0.483 h0.8 r90; Bottom Overlay "16" at 10.058,0.864 h0.8 r90; Bottom Overlay "18" at 12.649,0.813 h0.8 r90; Bottom Overlay "52" at 27.711,0.838 h0.8 r90